# EAGLE board Разметка для корпуса (EAGLE 6.2)
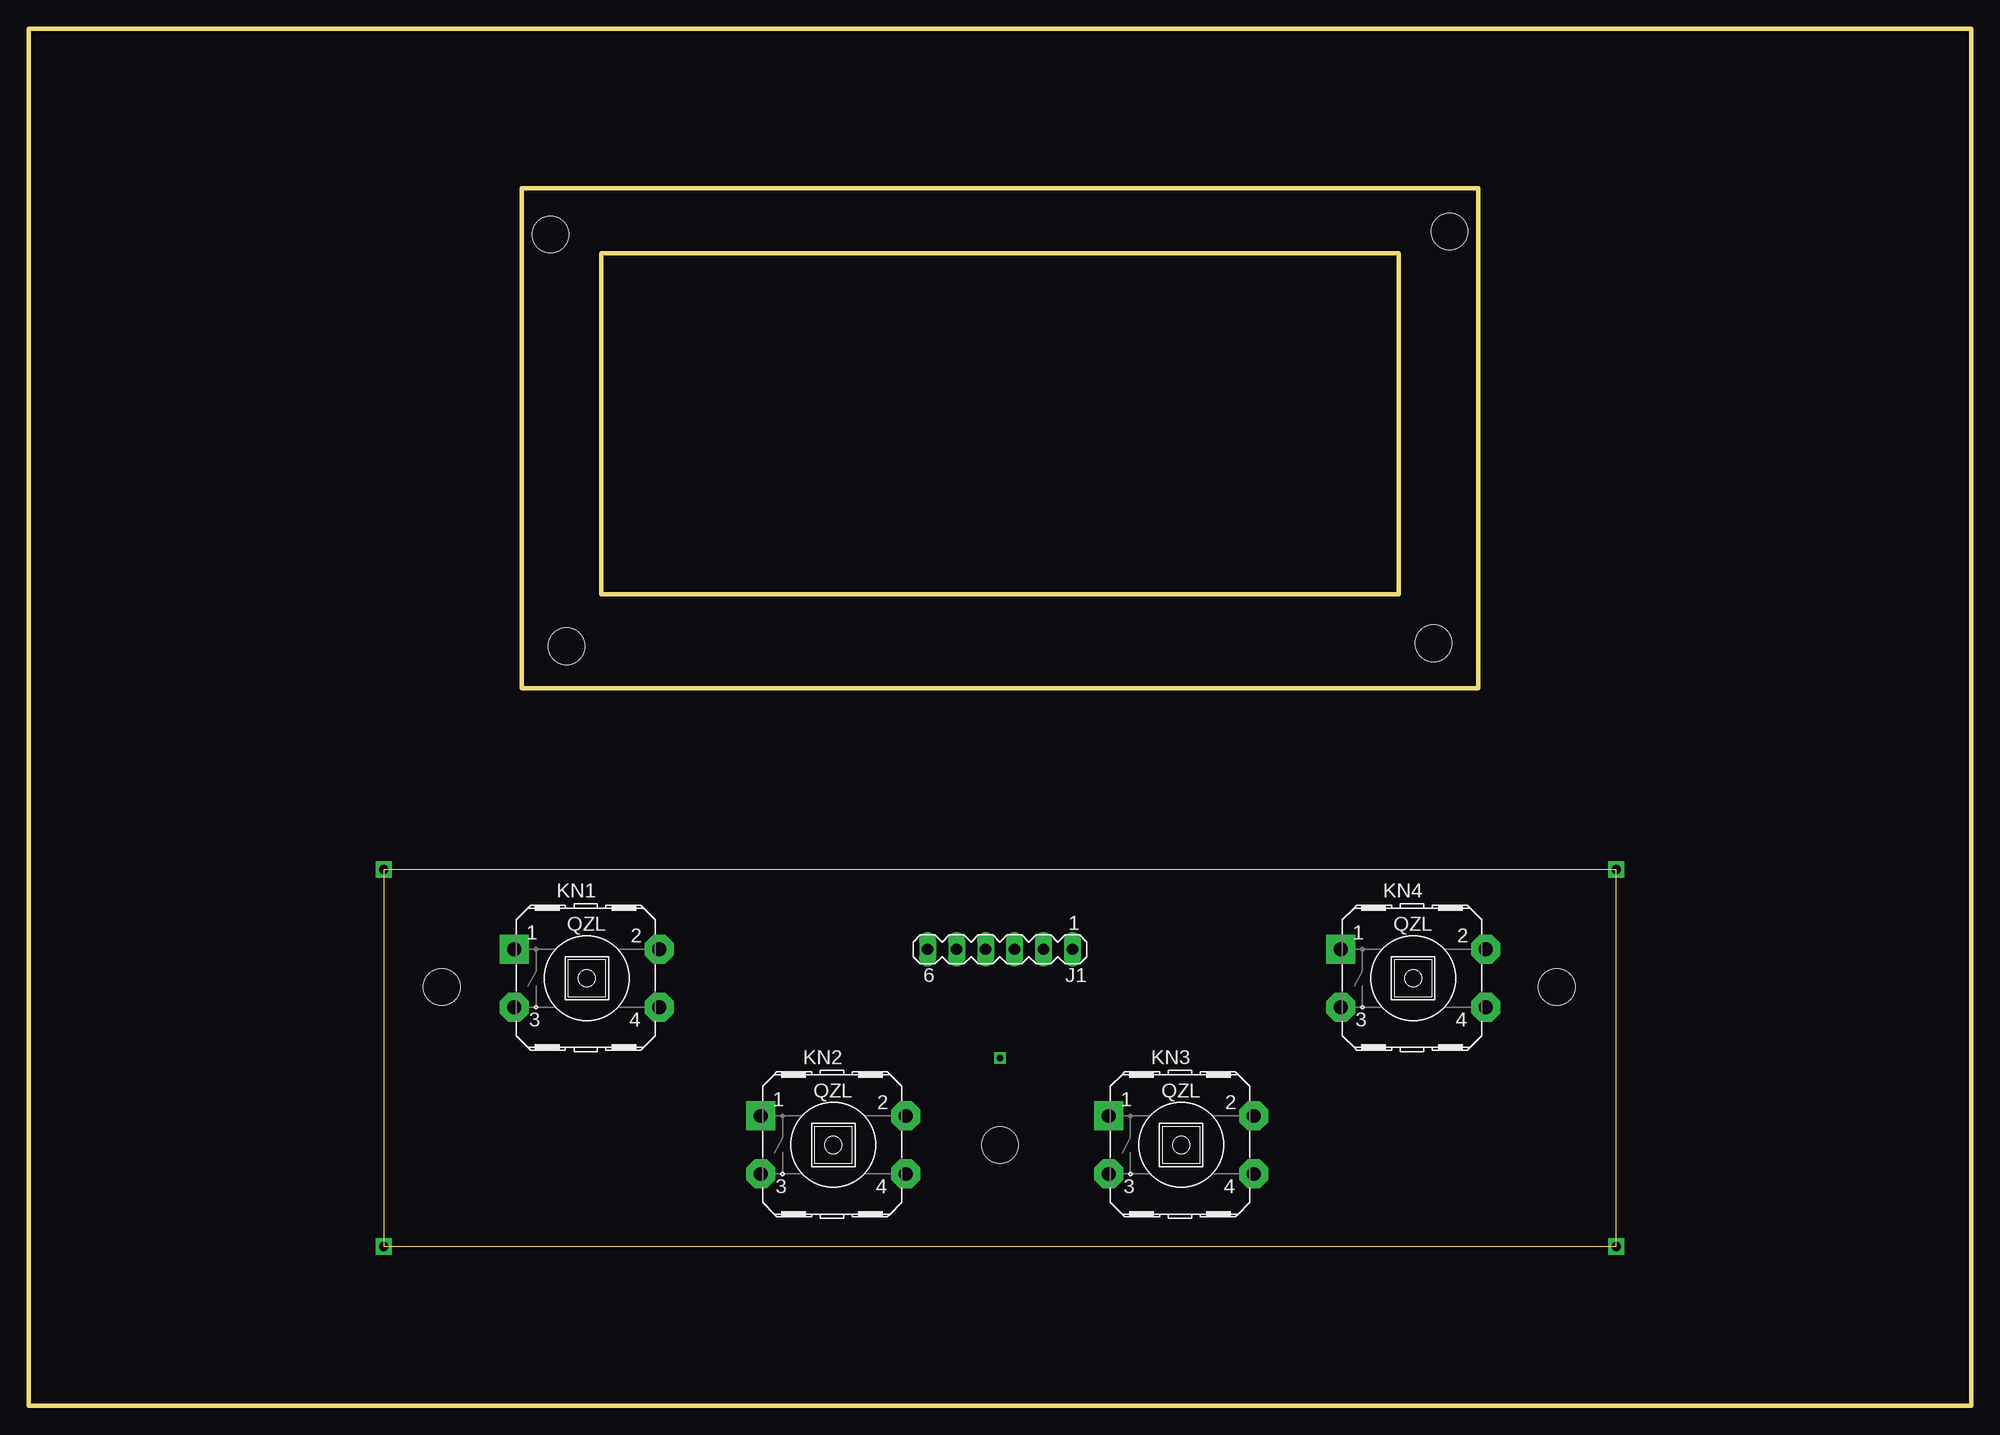
[diagram p0: board, top side]
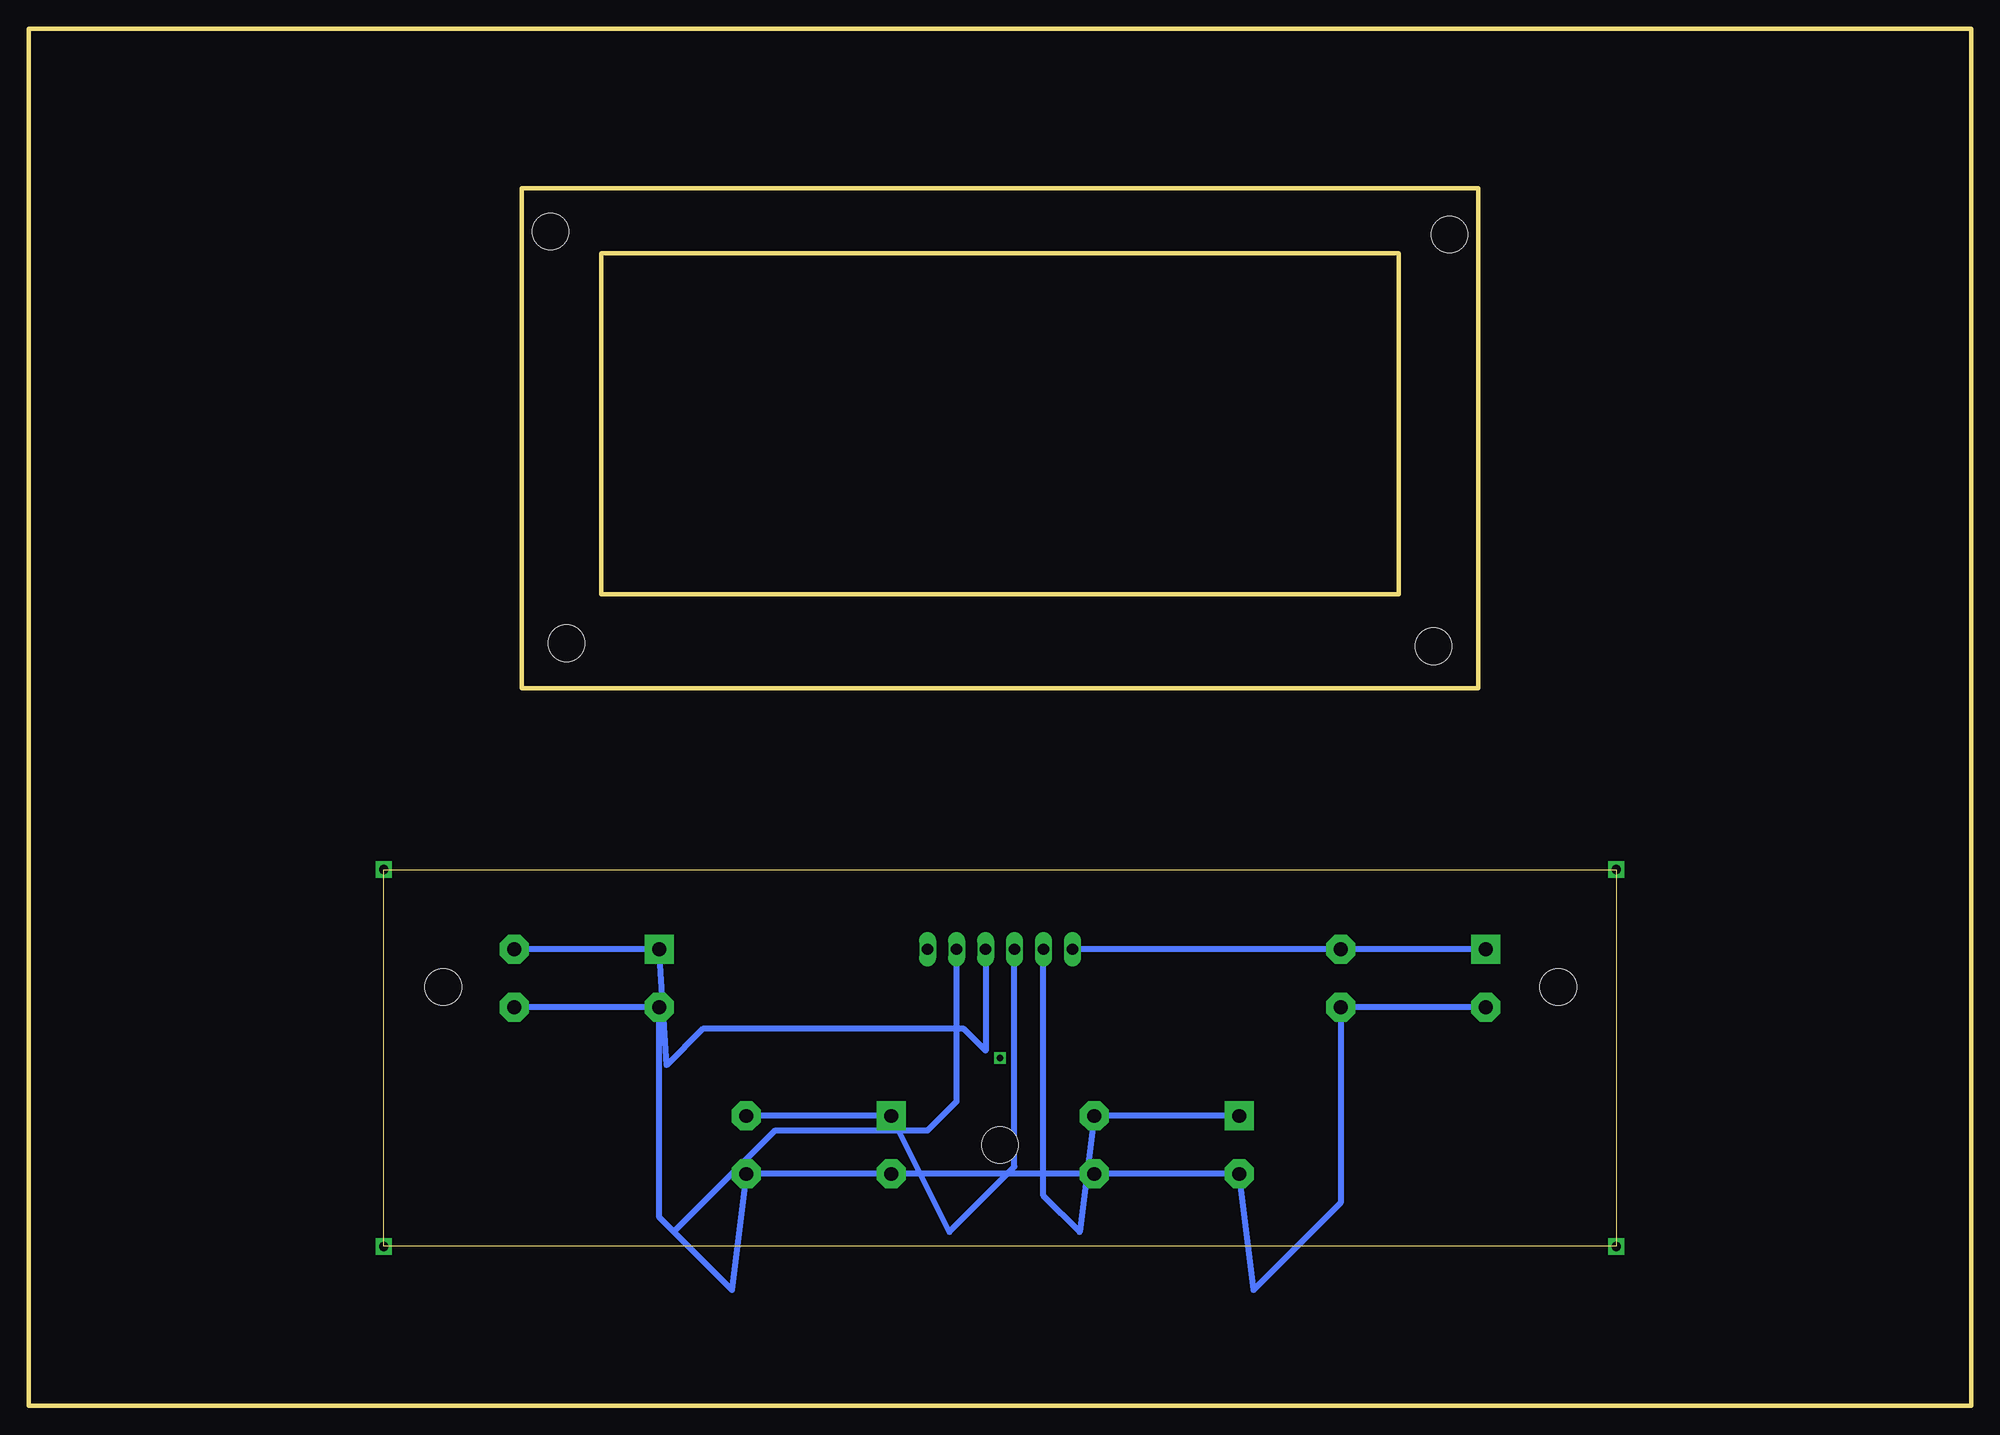
[diagram p1: board, bottom side, seen from below]

Size 170.18 x 120.65 mm. Coordinates in mm from the lower left corner, seen from the top.
Outline: 31.12,13.97 139.06,13.97 139.06,46.99 31.11,46.99 31.12,13.97
Outline: 0,0 170.18,0 170.18,120.65 0,120.65 0,0
Outline: 43.18,62.87 127,62.87 127,106.68 43.18,106.68 43.18,62.87
Outline: 50.16,100.97 120.02,100.97 120.02,71.12 50.16,71.12 50.16,100.97
Copper layers (1*16): Top 0.035mm / dielectric 1.5mm / Bottom 0.035mm
Design rules: minimum track width 10mil, minimum drill 24mil, track to track 8mil, track to pad 8mil, pad to pad 8mil, via to via 8mil, smd to smd 8mil, copper to edge 40mil, drill to drill 8mil, minimum pad ring 10mil, minimum via ring 8mil, stop-mask expansion 4mil, vias tented up to drill 0mil, thermal gap 10mil
Holes 3.2 mm at 36.2,36.71 133.86,36.71 85.09,22.86 45.72,102.62 124.46,102.87 47.12,66.55 123.06,66.8

## Footprints (pad centres in the part's own frame; a part is rotated, then mirrored left to right if it is on the bottom)
MA06-1 = drill 1 long: 1 -6.35,0; 2 -3.81,0; 3 -1.27,0; 4 1.27,0; 5 3.81,0; 6 6.35,0
LZQ-KN = drill 1.2 pad 2.54 square: 1 -6.35,2.54 | drill 1.2 pad 2.54 octagon: 2 6.35,2.54; 3 -6.35,-2.54; 4 6.35,-2.54

## Placement (x,y rotation side)
J1  [MA06-1]  85.09,40.01 180 top
KN1  LZQ-KN  [LZQ-KN]  48.89,37.47 0 top
KN2  LZQ-KN  [LZQ-KN]  70.48,22.86 0 top
KN3  LZQ-KN  [LZQ-KN]  100.96,22.86 0 top
KN4  LZQ-KN  [LZQ-KN]  121.28,37.47 0 top

## Library data of the parts
J1 = con-lstb
KN1-KN4 = Dmitry

## Nets
+5V: J1.2 KN1.3 KN1.4 KN2.3 KN2.4 KN3.3 KN3.4 KN4.3 KN4.4
GND: J1.1
N$1: J1.6 KN1.1 KN1.2
N$2: J1.5 KN2.1 KN2.2
N$5: J1.4 KN3.1 KN3.2
N$6: J1.3 KN4.1 KN4.2

## Tracks (layer width: path | path; a pad name or v marks a point on that pad's centre or on a via)
+5V
  Bottom 0.508: KN1.3 KN1.4 55.24,17.78 62.86,10.16 KN2.3 KN2.4 KN3.3 KN3.4 108.58,10.16 113.66,15.24 | 113.66,15.24 114.93,16.51 KN4.3 KN4.4 | J1.2 88.9,26.67 91.44,24.13 104.77,24.13 113.66,15.24
GND
  pour Top (isolate 0.813, no thermals): 31.11,36.83 31.11,3.81 139.06,3.81 139.06,36.83
  pour Bottom (isolate 0.813, no thermals): 31.11,36.83 139.06,36.83 139.06,3.81 31.11,3.81
N$1
  Bottom 0.508: J1.6 KN1.2 KN1.1
N$2
  Bottom 0.508: J1.5 81.28,18.41 78.11,15.24 KN2.2 KN2.1
N$3  (via drill 0.6)
  other vias: 85.09,30.48
N$5
  Bottom 0.508: J1.4 83.82,20.95 89.53,15.24 KN3.1 KN3.2
N$6
  Bottom 0.508: J1.3 86.36,31.11 88.27,33.02 111.12,33.02 114.3,29.84 KN4.1 KN4.2
N$15  (via drill 0.8 pad 1.42)
  other vias: 31.11,46.99
N$16  (via drill 0.8 pad 1.42)
  other vias: 31.11,13.97
N$17  (via drill 0.8 pad 1.42)
  other vias: 139.06,46.99
N$18  (via drill 0.8 pad 1.42)
  other vias: 139.06,13.97

## Text on the board
Drill_legend: Drill legend | Date: 05.05.2012 14:55:05 | 3.2000 mm / 125.984 mil | 1.2000 mm / 47.244 mil | 1.0000 mm / 39.370 mil | 0.8000 mm / 31.496 mil